# Altium PCB ST-Link-V2.2.PcbDoc
Units mm, origin at the board's own origin, x right, y up, seen from the top; angles counter-clockwise.
Board outline 30.17 x 15.17 mm, 2 copper layers (Top Layer, Bottom Layer); 33 components, 48 nets, 159 pads, 44 vias.
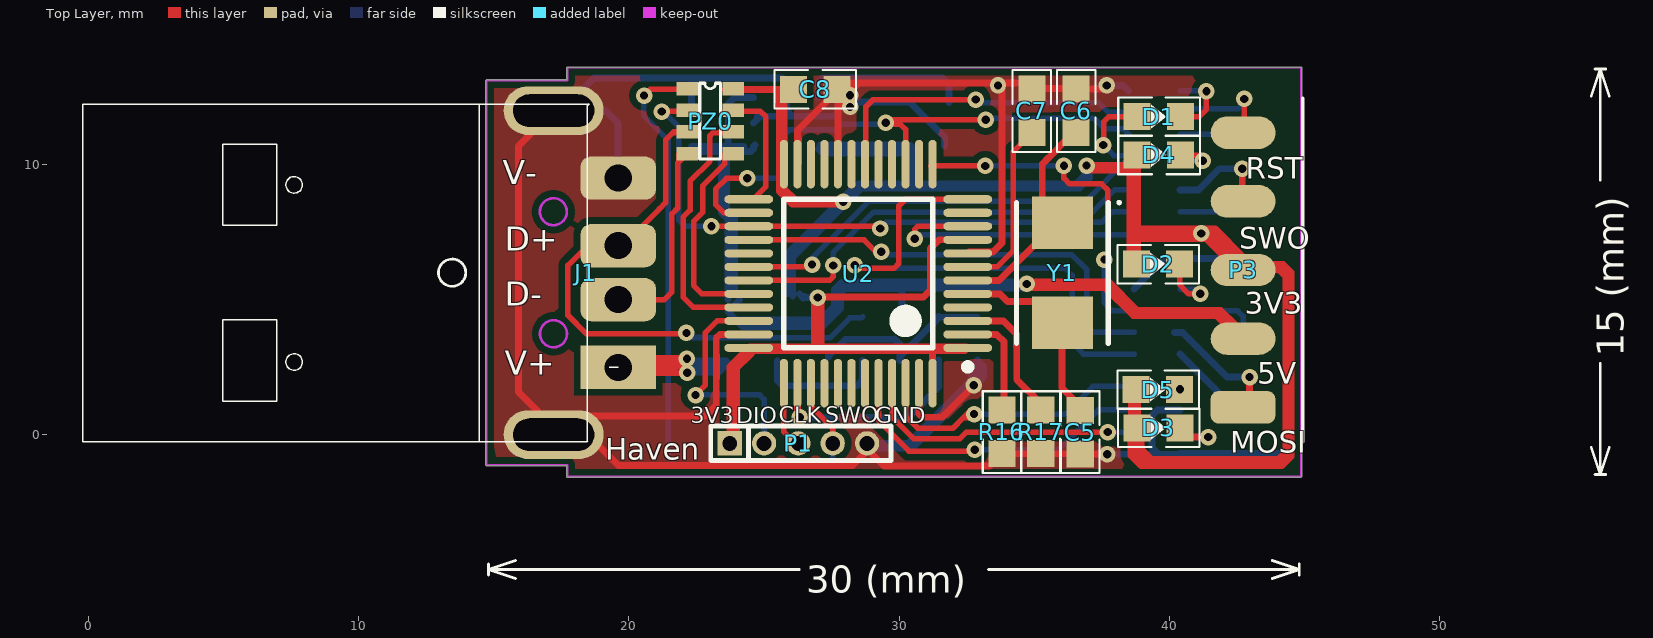
[diagram p0: Top Layer view]
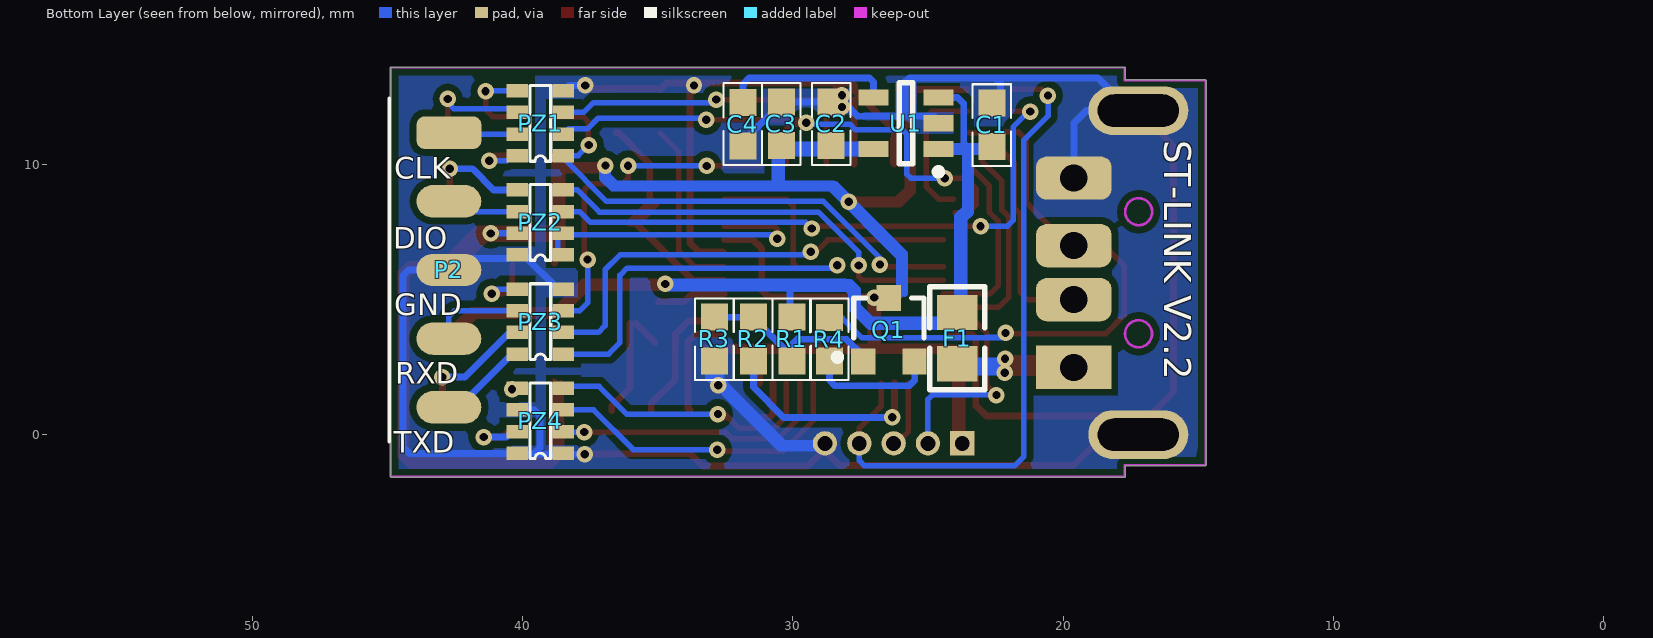
[diagram p1: Bottom Layer view, seen from below]

## Layer stack, top to bottom
Top Layer: signal copper 0.0356
Dielectric: dielectric 0.32, FR-4, Dk 4.8
Bottom Layer: signal copper 0.0356

## Board outline
14.742,-1.143 15.166,-1.143 15.102,-1.143 17.709,-1.143 17.709,-1.544 ccw(c17.735,-1.544) 17.723,-1.566 ccw(c17.735,-1.544) 17.735,-1.569 44.855,-1.569 ccw(c44.855,-1.544) 44.873,-1.562 cw(c44.855,-1.544) 44.873,-1.562 44.885,-1.55 cw(c44.866,-1.532) 44.884,-1.551 44.884,-1.55 ccw(c44.866,-1.532) 44.892,-1.532 44.892,13.574 ccw(c44.866,13.574) 44.866,13.6 17.739,13.6 ccw(c17.739,13.574) 17.713,13.574 17.713,13.127 14.742,13.127 ccw(c14.742,13.102) 14.717,13.102 14.717,-1.117 ccw(c14.742,-1.117)

## Design rules (kind name [scope] priority, off if disabled: settings)
Clearance Clearance_GND [InPolygon] p1: gap=0.254
Clearance [All] p2: gap=0.178
DiffPairsRouting [All] p1: maxlimit=0.254 minlimit=0.254 mostfreqgap=0.254 maxuncoupledlength=12.7
HoleToHoleClearance [All] p1 off: gap=0.254 allowstackedmicrovias=TRUE
MinimumSolderMaskSliver [All] p1 off: minsoldermaskwidth=0.254
PlaneConnect [All] p1: planeconnectstyle=Direct reliefexpansion=0.508 reliefentries=4 reliefconductorwidth=0.254 reliefairgap=0.254
PolygonConnect [All] p1: connectstyle=Direct reliefconductorwidth=0.254 reliefentries=4 polygonreliefangle="90 Angle"
RoutingVias [All] p1: holewidth=0.305 width=0.61 viastyle="Through Hole" minholewidth=0.305 minwidth=0.61 maxholewidth=0.305 maxwidth=0.61
SilkToSilkClearance [All] p1 off: silktosilkclearance=0.254
SilkscreenOverComponentPads [All] p1 off: minsilkscreentomaskgap=0.254
SolderMaskExpansion [All] p1: expansion=0.102
Width [All] p1: maxlimit=0.508 minlimit=0.203 preferedwidth=0.203
22 further rules are at their usual default settings.

## Classes and differential pairs
differential pair USB: +USB_P -USB_N

## Components (designator, comment, footprint, x,y, rotation, side; value= is the part's Value field where it differs from the comment)
C1 "Cap" C-0603 22.644,11.454 r270 bottom
C2 "Cap" C-0603 28.586,11.495 r270 bottom
C3 "Cap" C-0603 30.428,11.495 r270 bottom
C4 "Cap" C-0603 31.85,11.496 r90 bottom
C5 "Cap" C-0603 36.703,0.099 r90 top
C6 "Cap" C-0603 36.549,11.975 r270 top
C7 "Cap" C-0603 34.915,11.975 r270 top
C8 "Cap" C-0603 26.895,12.776 r180 top
D1 "LED" SMT_LED_0603 39.607,11.773 r0 top
D2 "LED2" SMT_LED_0603 39.579,6.309 r0 top
D3 "LED2" SMT_LED_0603 39.595,0.25 r0 top
D4 "LED" SMT_LED_0603 39.608,10.349 r0 top
D5 "LED2" SMT_LED_0603 39.572,1.668 r0 top
F1 "Fuse1" 0805-1 23.927,3.576 r270 bottom
J1 "USB" USB-B 18.417,5.995 r90 top
P1 "Header 5" SIP5-1.27 25.005,-0.319 r180 top
P2 "Header 5" HEADER_5 42.726,11.175 r270 bottom
P3 "Header 5" HEADER_5 42.726,1.015 r90 top
PZ0 "1K" AR0603*4 22.162,12.801 r0 top
PZ1 "1K" AR0603*4 38.494,10.322 r0 bottom
PZ2 "1K" AR0603*4 38.494,6.655 r0 bottom
PZ3 "1K" AR0603*4 38.494,2.986 r0 bottom
PZ4 "1K" AR0603*4 38.494,-0.683 r0 bottom
Q1 "NPN" SOT23-3 26.453,3.884 r180 bottom
R1 "Res1" 0603-1 30.039,3.549 r270 bottom
R2 "Res1" 0603-1 31.464,3.549 r270 bottom
R3 "Res1" 0603-1 32.908,3.549 r270 bottom
R4 "Res1" 0603-1 28.65,3.523 r90 bottom
R16 "Res1" 0603-1 33.807,0.11 r270 top
R17 "Res1" 0603-1 35.242,0.11 r270 top
U1 "SPX3819" SOT23-5 25.819,11.526 r0 bottom
U2 "STM32F103CBT6" LQFP48_N 28.49,5.961 r180 top locked
Y1 "8M" "XAL5032 2-Leads" 36.044,5.989 r270 top

## Footprints (in the part's own frame and the unit in brackets; to place one, negate y for a bottom-side part, rotate by r counter-clockwise, add the part's x,y. Pads: shape width x height; smd on the part's side, far side on the other; paste and mask are expansions set on the pad)
0603-1 [mm]
  rect 1x1 smd: 1(-0.799,0) 2(0.813,0)
  silkscreen extent -1.5,-0.71 1.52,0.71, body extent -0.8,-0.4 0.8,0.4, height 0.3
0805-1 [mm]
  rect 1.3x1.5 smd: 1(-0.95,0) 2(0.95,0)
  silkscreen extent -1.91,-1.02 1.9,1.02, body extent -1,-0.62 1,0.63, height 0.5
AR0603*4 [mm]
  rect 0.8x0.5 smd: 1(0,0) 2(0,-0.8) 3(0,-1.6) 4(0,-2.4) 5(1.7,-2.4) 6(1.7,-1.6) 7(1.7,-0.8) 8(1.7,0)
  silkscreen extent 0.46,-2.6 1.23,0.2, body extent 0.04,-2.81 1.64,0.43, height 0.3
C-0603 [mm] "贴?"
  rect 1x1 smd: 1(-0.813,0) 2(0.799,0)
  silkscreen extent -1.51,-0.71 1.51,0.71, body extent -0.8,-0.4 0.8,0.4, height 0.3
HEADER_5 [mm]
  rrect50% 1.2x2.4 smd: 1(0,0)
  oval 1.2x2.4 smd: 2(2.54,0) 3(5.08,0) 4(7.62,0) 5(10.16,0)
  silkscreen extent -1.27,-2.21 11.43,-2.21, body extent -1.27,-10.75 11.43,0.79, height 1.78
LQFP48_N [mm] "Thin QFP, 48-Leads, Body 7x7mm, Pitch 0.5mm, IPC Medium Density"
  oval 1.8x0.3 smd: 1(-4.05,2.75) 2(-4.05,2.25) 3(-4.05,1.75) 4(-4.05,1.25) 5(-4.05,0.75) 6(-4.05,0.25) 7(-4.05,-0.25) 8(-4.05,-0.75) 9(-4.05,-1.25) 10(-4.05,-1.75) 11(-4.05,-2.25) 12(-4.05,-2.75) 25(4.05,-2.75) 26(4.05,-2.25) 27(4.05,-1.75) 28(4.05,-1.25) 29(4.05,-0.75) 30(4.05,-0.25) 31(4.05,0.25) 32(4.05,0.75) 33(4.05,1.25) 34(4.05,1.75) 35(4.05,2.25) 36(4.05,2.75)
  oval 0.3x1.8 smd: 13(-2.75,-4.05) 14(-2.25,-4.05) 15(-1.75,-4.05) 16(-1.25,-4.05) 17(-0.75,-4.05) 18(-0.25,-4.05) 19(0.25,-4.05) 20(0.75,-4.05) 21(1.25,-4.05) 22(1.75,-4.05) 23(2.25,-4.05) 24(2.75,-4.05) 37(2.75,4.05) 38(2.25,4.05) 39(1.75,4.05) 40(1.25,4.05) 41(0.75,4.05) 42(0.25,4.05) 43(-0.25,4.05) 44(-0.75,4.05) 45(-1.25,4.05) 46(-1.75,4.05) 47(-2.25,4.05) 48(-2.75,4.05)
  silkscreen extent -4.18,-2.75 2.75,3.57, body extent -3.5,-3.5 3.5,3.5, height 1.6
SIP5-1.27 [mm]
  rect 0.9x0.9 hole 0.55: 1(1.27,0)
  round 0.9 hole 0.55: 2(0,0) 3(-1.27,0) 4(-2.54,0) 5(-3.81,0)
  silkscreen extent -4.7,-0.64 1.97,0.64
SMT_LED_0603 [mm]
  rect 1x1 smd: 1(-0.8,0) 2(0.8,0)
  silkscreen extent -1.5,-0.71 1.52,0.71, body extent -0.81,-0.4 0.81,0.4, height 0.6
SOT23-3 [mm]
  rect 0.9x0.95 smd: 1(-0.95,-1.175) 2(0.95,-1.175) 3(0,1.175)
  silkscreen extent -2.03,-1.14 1.3,1.18, body extent -1.45,-1.4 1.45,1.4, height 1.2
SOT23-5 [mm] "Max4173"
  rect 1.1x0.6 smd: 1(-1.2,0.95) 2(-1.2,0) 3(-1.2,-0.95) 4(1.2,-0.95) 5(1.2,0.95)
  silkscreen extent -1.32,-1.5 0.25,1.92, body extent -1.4,-1.45 1.4,1.45, height 1.2
USB-B [mm]
  rect 1.6x2.8 hole 1: 1(-3.5,-1.195)
  rrect50% 1.6x2.8 hole 1: 2(-1,-1.195) 3(1,-1.195) 4(3.5,-1.195)
  oval 1.8x3.7 hole 1.2 slot 3 at 90 deg: 5(5.994,1.195) 6(-5.994,1.195)
  silkscreen extent -6.25,-1.2 6.25,18.62, body extent -6.25,-1.43 6.25,18.6, height 4.52
"XAL5032 2-Leads" [mm] "DFN, 2-Leads, Body 3.20x5.00mm, Pitch 3.70mm, IPC Low Density"
  rect 1.95x2.25 smd: 1(-1.85,0) 2(1.85,0)
  silkscreen extent -2.65,-1.7 2.6,2.15, body extent -2.6,-1.7 2.6,1.7, height 0.45

## Part data
C1 C2 C3 C4 C8: "Capacitor"
D1 D4: "LED ·¢¹"
D2 D3 D5: "Typical RED, GREEN, YELLOW, AMBER GaAs LED"
F1: "保?"
J1: "USB接?"
P1 P2 P3: "Header, 5-Pin"
PZ0 PZ1 PZ2 PZ3 PZ4: library part RES4R
Q1: library part NPN1, "ÌùÆ"
R1 R2 R3 R4 R16 R17: "ÌùÆ"
U2: library part STM32F103C8T6, "STM32 ARM-based 32-bit MCU with 64 Kbytes Flash, 48-pin LQFP, Industrial Temperature"
Y1: library part XTAL

## Via types
v1: diameter 0.61, hole 0.305, Top Layer to Bottom Layer, 44 vias

## Nets (pads, with @x,y where several pads share a name; then routed paths per layer and width w, separated by ;. In a path a pad name is that pad's centre, name@x,y a point inside that pad or via, vN(x,y) a via of type N, cw(c..) or ccw(c..) an arc to the next point about the centre after c; other vN are vias at no path point)
3.3V: C2.2 C3.2 C8.2 D2.1 D3.1 D4.1 D5.1 P1.1 P3.3 PZ0.8 PZ2.7 Q1.3 U1.5 U2.1 U2.9 U2.24 U2.36 U2.48 | length 172.1
  Top Layer w0.254: P1.1@23.512,-0.095 P1.1 ; PZ0.8@23.553,12.773 C8.2@25.681,12.773 ; P1.1@23.763,0.082 23.735,0.054 P1.1 ; P1.1@23.805,-0.319 P1.1 ; C8.2@25.74,12.545 C8.2@25.74,12.536 ; C8.2 C8.2@26.093,12.773 ; U2.48 31.24,3.116 ; 31.24,3.211 31.24,3.116 ; U2.1@32.414,3.211 U2.1 ; U2.9 31.482,7.211 31.153,6.882 31.153,5.339 30.909,5.095 v1@27.124,5.095 ; U2.1@33.262,3.211 U2.1 ; D2.1@38.532,6.556 D2.1@38.532,6.692 ; D5.1@38.592,1.892 38.592,0.93 ; D4.1@38.765,10.112 D4.1@38.733,10.112 ; D5.1@38.818,1.945 D3.1@38.818,0.704 ; D2.1@38.825,6.354 38.825,7.251 ; 38.951,-0.453 38.951,-0.532 ; P3.3@42.29,5.821 P3.3@42.588,6.119 ; P3.3@43.145,6.119 P3.3@42.713,6.119 ; 24.44,2.922 23.991,2.472 23.991,0.047 23.763,-0.18 23.763,0.164 23.746,0.181 23.746,2.517 24.345,3.116 U2.36@24.44,3.116 ; 24.44,2.922 U2.36@24.44,3.116 ; 24.44,2.922 U2.36@24.635,3.116 ; U2.36@24.44,3.116 U2.36 ; U2.36@24.44,3.116 U2.36@24.635,3.116 ; U2.36 23.76,3.211 23.735,3.186 U2.36 ; U2.36 24.486,3.256 U2.36@24.863,3.256 ; U2.36 24.539,3.211 U2.36@24.635,3.116 ; U2.36@24.635,3.116 U2.36@24.813,3.116 ; U2.36@24.813,3.116 U2.36@24.909,3.211 ; U2.36@24.813,3.116 31.24,3.116 ; U2.36@24.863,3.256 U2.36@24.909,3.211 ; U2.36@24.863,3.256 26.433,3.256 26.433,3.25 ; U2.36@24.909,3.211 26.433,3.211 ; C8.2@25.681,12.773 25.803,12.896 26.101,12.896 C8.2@25.978,12.773 ; C8.2@25.681,12.773 25.537,12.629 25.537,12.332 C8.2@25.74,12.536 ; C8.2@25.681,12.773 C8.2@25.978,12.773 ; C8.2@25.74,12.421 C8.2@25.74,12.536 ; C8.2@25.74,12.421 U2.24 25.74,9.098 26.16,8.678 27.874,8.678 v1(27.933,8.619) 27.849,8.535 26.034,8.535 25.574,8.995 25.574,12.254 C8.2@25.74,12.421 ; C8.2@25.74,12.421 C8.2@26.093,12.773 ; C8.2@25.74,12.536 C8.2@25.978,12.773 ; C8.2@25.978,12.773 C8.2@26.093,12.773 ; 26.433,3.211 26.394,3.25 26.433,3.25 ; 26.433,3.211 26.433,3.25 ; 26.433,3.25 26.878,3.25 ; 26.878,3.25 26.878,5.073 26.9,5.095 v1@27.124,5.095 ; 26.878,3.25 27.12,3.25 ; 27.12,3.25 27.12,5.09 v1@27.124,5.095 ; 27.12,3.25 32.501,3.25 U2.1 ; 31.24,3.116 32.445,3.116 U2.1 ; D2.1@38.532,6.692 38.733,6.893 38.733,7.251 ; D2.1@38.532,6.692 38.532,7.404 ; 38.532,7.404 38.733,7.404 ; 38.532,7.404 38.532,7.612 ; 38.532,7.612 38.733,7.612 ; 38.532,7.612 D4.1@38.532,9.916 ; D4.1@38.532,9.916 38.651,9.916 D4.1@38.825,10.341 ; D4.1@38.532,9.916 38.532,10.049 38.617,9.964 36.944,9.964 v1(36.937,9.957) 37.109,9.784 38.4,9.784 D4.1@38.532,9.916 ; D3.1@38.592,0.478 38.592,0.93 ; D3.1@38.592,0.478 D3.1@38.798,0.684 ; D3.1@38.592,0.478 38.575,0.46 38.575,-0.767 38.946,-1.138 44.172,-1.138 44.505,-0.804 44.505,6.011 44.209,6.307 42.901,6.307 P3.3@42.713,6.119 ; 38.592,0.93 D3.1@38.818,0.704 ; 38.733,7.251 38.825,7.251 ; 38.733,7.251 38.733,7.404 ; 38.733,7.404 38.733,7.612 ; 38.733,7.404 38.825,7.404 ; 38.733,7.612 D4.1@38.733,10.112 ; 38.733,7.612 38.825,7.612 ; D4.1@38.733,10.112 38.596,10.112 D4.1@38.733,10.249 ; D4.1@38.733,10.112 D4.1@38.733,10.249 ; D4.1@38.733,10.249 D4.1@38.825,10.341 ; D3.1@38.798,0.684 D3.1@38.818,0.704 ; D3.1@38.798,0.684 38.798,-0.833 38.951,-0.833 ; D3.1@38.818,0.704 38.951,0.571 38.951,-0.532 ; 38.825,7.251 38.825,7.404 ; 38.825,7.251 41.346,7.251 42.478,6.119 P3.3@42.588,6.119 ; 38.825,7.404 38.825,7.612 ; 38.825,7.404 41.511,7.404 ; 38.825,7.612 D4.1@38.825,10.341 ; 38.825,7.612 v1@41.013,7.612 ; 38.951,-0.833 38.951,-0.532 ; 38.951,-0.833 38.956,-0.833 39.029,-0.906 39.325,-0.906 ; 38.951,-0.532 39.325,-0.906 ; 39.325,-0.906 44.056,-0.906 44.317,-0.645 44.317,5.854 44.121,6.049 44.19,6.119 P3.3@42.713,6.119 ; v1@41.013,7.612 v1(41.176,7.449) 41.511,7.449 ; v1@41.013,7.612 41.701,7.612 42.713,6.6 P3.3@42.713,6.247 ; 41.511,7.404 41.511,7.321 41.573,7.259 ; 41.511,7.404 41.555,7.404 ; 41.511,7.404 41.511,7.449 ; 41.511,7.449 41.555,7.404 ; 41.555,7.404 41.7,7.259 ; 41.573,7.259 P3.3@42.713,6.119 ; 41.573,7.259 41.7,7.259 ; 41.7,7.259 P3.3@42.713,6.247 ; P3.3@42.588,6.119 P3.3@42.713,6.119 ; P3.3@42.588,6.119 P3.3@42.713,6.119 ; P3.3@42.713,6.119 P3.3@42.713,6.247
  Bottom Layer w0.254: 25.875,5.22 25.875,6.706 26.068,6.9 ; Q1.3@26.068,5.128 26.068,6.584 ; Q1.3@26.31,5.201 Q1.3 ; Q1.3@26.337,5.182 26.443,5.077 Q1.3@26.471,5.077 ; Q1.3@26.504,5.11 Q1.3@26.471,5.077 ; v1(26.994,5.077) Q1.3@26.471,5.077 ; U1.5@27.07,10.721 30.147,10.721 30.169,10.699 C3.2@30.169,10.67 ; 30.428,9.246 30.428,9.273 ; v1(36.937,9.957) 36.851,9.87 36.851,9.579 36.555,9.283 30.643,9.283 ; v1@36.977,9.916 37.05,9.844 37.05,9.489 36.684,9.123 28.607,9.123 26.068,6.584 ; PZ2.7@40.394,7.455 41.171,7.455 v1(41.176,7.449) ; 26.068,6.584 26.068,6.9 ; 26.068,6.9 28.428,9.26 28.486,9.26 28.499,9.273 30.428,9.273 ; C3.2@30.308,10.576 U1.5 27.175,10.419 30.152,10.419 C3.2@30.308,10.576 ; C3.2@30.308,10.576 C3.2 ; 30.428,9.273 C3.2 ; 30.428,9.273 30.454,9.273 30.464,9.283 30.643,9.283 ; C3.2 30.666,10.457 30.666,9.306 30.643,9.283
5V: C1.2 F1.1 P3.2 R1.1 U1.1 U1.3 | length 64.5
  Top Layer w0.254: P3.2@43.145,3.579 42.875,3.579 42.619,3.835 P3.2@42.447,3.835 ; P3.2@42.447,3.835 42.447,4.051 41.895,4.604 38.807,4.604 37.75,5.66 34.807,5.66 v1(34.725,5.578) 34.852,5.451 37.624,5.451 38.671,4.404 41.751,4.404 42.319,3.835 P3.2@42.447,3.835
  Bottom Layer w0.254: 23.595,10.711 23.617,10.689 23.617,10.662 ; F1.1@23.667,5.006 23.667,7.98 23.435,8.212 23.435,10.477 ; 23.906,5.245 23.906,8.088 23.617,8.377 23.617,10.477 ; F1.1@24.102,4.988 23.665,4.551 F1.1@23.975,4.241 ; U1.1@24.256,10.662 23.684,10.662 ; U1.1@24.612,10.662 U1.1@24.67,10.721 ; U1.1 24.52,10.477 23.747,10.477 ; U1.3 23.91,12.476 23.684,12.25 23.684,10.662 ; 27.754,5.077 27.754,5.167 27.845,5.259 ; 28.056,5.649 34.654,5.649 v1(34.725,5.578) 34.579,5.432 29.668,5.432 ; R1.1@30.039,4.405 R1.1 30.103,4.413 30.103,5.414 28.275,5.414 ; 23.314,10.477 23.435,10.477 ; 23.314,10.477 23.435,10.598 ; 23.314,10.477 22.505,10.477 22.32,10.662 23.386,10.662 23.435,10.662 ; 23.435,10.477 23.617,10.477 ; 23.435,10.477 23.435,10.598 ; 23.435,10.598 23.435,10.662 ; 23.435,10.662 23.617,10.662 ; 23.617,10.477 23.617,10.662 ; 23.617,10.477 23.747,10.477 ; 23.617,10.662 23.684,10.662 ; 23.684,10.662 23.684,10.54 23.747,10.477 ; F1.1@23.975,4.241 25.351,4.241 ; F1.1@23.975,4.241 24.213,4.003 25.589,4.003 ; 25.351,4.241 27.102,4.241 27.615,4.754 ; 25.351,4.241 25.589,4.003 ; 25.589,4.003 27.16,4.003 27.845,4.689 27.845,4.985 ; 27.615,4.754 27.615,5.37 27.876,5.631 28.491,5.631 28.275,5.414 ; 27.615,4.754 27.845,4.985 ; 27.845,4.985 27.845,5.259 ; 27.845,5.259 28,5.414 28.275,5.414
BOOT0: PZ4.3 U2.44 | length 11.9
  Top Layer w0.203: U2.44 29.24,0.522 30.365,-0.602 32.749,-0.602 v1(32.8,-0.551)
  Bottom Layer w0.203: v1(32.8,-0.551) 35.908,-0.551 37.376,0.917 PZ4.3@38.694,0.917
GND: C1.1 C2.1 C3.1 C4.1 C5.1 C6.1 C7.1 C8.1 J1.4 J1.5 J1.6 P1.5 P2.3 PZ1.4 PZ2.8 PZ3.4 PZ4.1 PZ4.6 PZ4.8 R3.2 R16.2 R17.2 U1.2 U2.8 U2.20 U2.23 U2.35 U2.47 | length 137
  Top Layer w0.254: J1.6 J1.6@17.405,0.001 ; J1.5 15.917,10.685 15.917,1.577 17.405,0.088 J1.6@17.405,0.001 ; J1.6@18.202,0.693 22.843,0.693 23.236,1.085 23.236,2.952 ; 23.238,2.065 23.246,2.074 23.246,2.942 23.236,2.952 ; U2.35@24.184,3.711 23.375,3.711 23.236,3.572 23.236,2.952 ; 26.286,10.949 26.286,10.056 U2.23 26.24,11.25 27.713,12.723 27.713,12.896 27.825,13.008 28.497,13.008 ; C8.1@27.713,12.388 27.874,12.163 27.74,12.163 ; U2.20 27.74,12.163 ; C8.1@27.74,12.341 27.74,12.252 ; P1.5 P1.5@28.815,-0.53 ; U2.47 30.74,0.775 30.869,0.647 31.594,0.647 32.76,1.812 v1(32.76,1.828) ; U2.8 32.586,6.756 33.479,6.756 33.814,7.091 33.814,12.822 v1@33.628,13.008 ; C7.1@34.918,12.771 34.68,13.008 v1@33.628,13.008 ; C7.1@35.1,12.808 36.947,12.808 36.967,12.828 C6.1@36.568,12.785 ; C5.1@36.213,-0.721 C5.1@36.233,-0.701 ; C6.1 37.549,12.787 v1(37.684,12.922) ; C5.1 37.694,-0.714 v1(37.702,-0.722) ; C5.1@37.059,-0.701 C5.1@36.233,-0.701 ; J1.6@17.405,0.001 18.481,0.001 19.618,-1.135 27.998,-1.135 28.275,-1.135 28.815,-0.596 P1.5@28.815,-0.53 ; 27.74,12.163 27.74,12.252 ; 27.74,12.252 28.497,13.008 ; 28.497,13.008 v1@33.628,13.008 ; P1.5@28.815,-0.53 29.446,-1.161 33.348,-1.161 R16.2 C5.1@36.233,-0.701
  Bottom Layer w0.254: J1.5@17.642,11.849 J1.5@17.5,11.991 ; J1.4@19.6,9.491 19.6,11.535 19.144,11.991 J1.5@17.5,11.991 ; C1.1@22.32,12.274 22.32,12.991 22.532,13.203 ; U1.2 U1.2@24.877,11.784 ; U1.2@24.764,11.784 U1.2@24.877,11.784 ; 26.027,11.809 25.847,11.99 25.847,13.042 25.686,13.203 22.532,13.203 ; v1(28.186,12.127) 27.951,12.127 27.608,11.784 U1.2@24.877,11.784 ; C2.1@28.233,12.311 30.38,12.311 31.68,11.011 C4.1@31.68,10.687 ; v1(32.76,1.828) v1@32.76,1.855 ; R3.2@32.76,2.382 v1@32.76,2.129 ; R3.2@32.908,2.741 32.908,2.762 R3.2@33.107,2.563 ; v1(37.684,12.922) 38.294,12.922 PZ1.4 ; v1(37.702,-0.722) 39.596,-0.722 ; PZ3.4@38.694,5.386 39.963,6.655 40.394,6.655 40.522,6.526 42.306,6.526 42.732,6.1 44.214,6.1 44.428,5.885 44.428,-0.454 44.185,-0.697 40.408,-0.697 PZ4.8@40.394,-0.683 ; PZ4.8@40.355,-0.722 39.596,-0.722 ; PZ4.6@40.394,0.917 39.552,0.917 39.355,0.719 39.355,-0.481 39.596,-0.722 ; J1.5@17.5,11.991 18.712,13.203 22.532,13.203 ; v1@32.511,1.855 30.337,-0.319 P1.5 28.992,-0.495 30.503,-0.495 v1@32.853,1.855 ; v1@32.511,1.855 32.486,1.855 v1@32.657,2.026 ; v1@32.511,1.855 v1@32.76,1.855 ; v1@32.511,1.855 v1@32.76,2.104 ; v1@32.657,2.026 32.657,2.485 R3.2 ; v1@32.657,2.026 v1@32.76,2.129 ; v1@32.76,1.855 v1@32.76,2.104 ; v1@32.76,1.855 v1@32.853,1.855 ; v1@32.76,2.104 32.908,2.252 R3.2@32.908,2.277 ; v1@32.76,2.104 v1@32.76,2.129 ; v1@32.76,2.129 R3.2@32.908,2.277 ; v1@32.853,1.855 33.125,2.126 33.125,2.519 R3.2 ; R3.2@32.908,2.277 R3.2
  other v1: 28.188,12.561 33.661,12.922
LED1: D1.2 PZ1.5 | length 2.7
  Top Layer w0.203: D1.2 41.111,11.773 41.371,12.033 v1(41.371,12.711)
  Bottom Layer w0.203: PZ1.5@40.394,12.724 41.359,12.724 v1(41.371,12.711)
LED2: D4.2 PZ1.8 | length 1.8
  Top Layer w0.203: D4.2@40.425,10.341 41.025,10.341 v1(41.233,10.133)
  Bottom Layer w0.203: PZ1.8@40.394,10.324 40.585,10.133 v1(41.233,10.133)
LED_PWR: D2.2 PZ3.5 | length 2.5
  Top Layer w0.203: D2.2 40.379,5.549 40.715,5.213 v1(41.142,5.213)
  Bottom Layer w0.203: PZ3.5@40.394,5.386 40.969,5.386 v1(41.142,5.213)
NetC4_2: C4.2 U1.4 | length 6.2
  Bottom Layer w0.254: U1.4 27.019,13.051 27.164,13.196 31.619,13.196 31.85,12.964 C4.2
NetC7_2: C7.2 U2.7 | length 6.6
  Top Layer w0.203: U2.7 33.628,6.211 34.222,6.804 34.222,10.462 C7.2@34.918,11.159
NetQ1_1: Q1.1 R1.2 R2.1 R3.1 | length 7.2
  Bottom Layer w0.254: Q1.1@27.393,2.874 27.393,2.912 28.012,3.531 29.829,3.531 29.841,3.543 30.039,3.345 R1.2@30.039,2.893 ; R1.2 R1.2@30.039,2.893 ; R2.1@31.433,4.361 31.458,4.336 31.458,4.348 R2.1 ; R2.1@31.464,4.374 R2.1 ; R3.1@32.878,4.348 R2.1 ; R1.2@30.039,2.893 31.464,4.319 R2.1
NetQ1_2: Q1.2 R4.1 | length 4.8
  Bottom Layer w0.254: Q1.2@25.493,2.727 25.493,2.016 25.699,1.81 28.438,1.81 28.65,2.023 R4.1@28.65,2.75
NetR16_1: R16.1 U2.2 | length 4
  Top Layer w0.254: U2.2 33.611,3.711 33.877,3.445 33.877,0.979 R16.1
NetR17_1: R17.1 U2.3 | length 5.2
  Top Layer w0.254: U2.3 33.865,4.211 34.35,3.726 34.35,3.271 34.352,3.269 34.352,2.051 35.242,1.16 R17.1
OS_IN: C5.2 U2.5 Y1.2 | length 7.1
  Top Layer w0.254: U2.5 33.729,5.211 34.008,4.932 Y1.2@34.984,4.932 ; Y1.2@35.099,3.407 Y1.2@35.804,4.112 ; Y1.2@36.027,4.123 36.027,1.735 36.703,1.059 C5.2
OS_OUT: C6.2 U2.6 Y1.1 | length 14.5
  Top Layer w0.254: U2.6 33.703,5.711 35.804,7.812 Y1.1@35.298,8.318 ; 35.514,10.232 35.298,10.016 ; C6.2 36.458,11.175 35.298,10.016 ; Y1.1@35.298,8.318 35.056,8.561 Y1.1 ; Y1.1@35.298,8.318 35.298,8.255 35.733,7.82 36.027,7.823 Y1.1@35.298,8.553 ; Y1.1@35.298,8.318 Y1.1@35.298,8.553 ; Y1.1@35.298,8.553 35.195,8.656 Y1.1 ; Y1.1@35.298,8.553 Y1.1@35.298,8.584 ; Y1.1@35.298,8.584 Y1.1 ; Y1.1@35.298,8.584 35.298,10.016
P_MOSI: P3.1 PZ3.7 | length 4.6
  Top Layer w0.254: v1(42.965,2.131) 42.965,1.218 P3.1@43.145,1.039
  Bottom Layer w0.254: PZ3.7 40.48,3.786 42.135,2.131 v1(42.965,2.131)
P_NRST: P3.5 PZ1.6 | length 4
  Top Layer w0.203: v1(42.767,12.424) 42.767,11.576 P3.5@43.145,11.199
  Bottom Layer w0.203: PZ1.6@40.394,11.924 40.529,12.059 42.54,12.059 42.767,12.286 v1(42.767,12.424)
P_RXD: P2.4 PZ3.6 | length 3.8
  Bottom Layer w0.203: PZ3.6@40.394,4.586 42.526,4.586 42.732,4.38 P2.4@42.732,3.56 ; P2.4@42.804,3.92 P2.4@43.164,3.56
P_SWCLK: P2.1 PZ1.7 | length 2.5
  Bottom Layer w0.203: PZ1.7@40.394,11.124 P2.1@42.676,11.124 ; P2.1@42.607,11.054 P2.1@42.676,11.124 ; P2.1@42.732,11.18 P2.1@42.676,11.124
P_SWDIO: P2.2 PZ2.6 | length 2.5
  Bottom Layer w0.203: PZ2.6@40.394,8.255 42.347,8.255 P2.2@42.732,8.64
P_SWO: P3.4 PZ2.5 | length 3.8
  Top Layer w0.254: v1(42.698,9.84) 42.698,8.674 P3.4@42.713,8.659
  Bottom Layer w0.254: PZ2.5@40.394,9.055 41.078,9.055 41.863,9.84 v1(42.698,9.84)
P_TXD: P2.5 PZ3.8 | length 3.9
  Bottom Layer w0.254: PZ3.8@40.394,2.986 42.36,1.02 P2.5@42.732,1.02 ; P2.5@42.563,1.189 P2.5@42.732,1.02 ; P2.5@43.27,1.02 P2.5@42.732,1.02
RX_LED_N: D5.2 PZ4.5 | length 0.5
  Top Layer w0.203: v1(40.391,1.686) v1(40.391,1.686)
  Bottom Layer w0.203: v1(40.391,1.686) 40.523,1.554 40.557,1.554 PZ4.5@40.394,1.717
RX_LED_P: PZ4.4 U2.46 | length 11.1
  Top Layer w0.203: U2.46 30.24,0.701 30.701,0.24 31.987,0.24 32.37,0.623 ; v1@32.7,0.865 32.612,0.865 32.37,0.623 ; v1@32.77,0.682 32.712,0.623 32.37,0.623
  Bottom Layer w0.203: v1@32.829,0.682 32.77,0.682 32.77,0.756 36.143,0.756 37.173,1.785 38.626,1.785 PZ4.4@38.694,1.717
  other v1: 32.776,0.767
STA_LED: D1.1 PZ1.1 U2.30 | length 19.3
  Top Layer w0.203: U2.30 v1@26.697,6.211 ; v1@26.741,6.211 v1@26.697,6.211 ; v1(26.781,6.295) v1@26.697,6.211 ; v1(37.551,10.717) 37.577,10.742 37.577,11.586 37.763,11.773 D1.1
  Bottom Layer w0.203: v1(26.781,6.295) 26.781,6.546 28.872,8.636 36.889,8.636 38.494,10.241 PZ1.1 37.946,10.322 v1(37.551,10.717)
SWCLK0: P1.3 U2.37 | length 2.7
  Top Layer w0.203: U2.37 25.74,0.106 26.08,-0.234 P1.3@26.491,-0.234
SWDIO0: P1.2 U2.34 | length 8.2
  Top Layer w0.203: v1(22.473,1.467) 22.829,1.823 22.829,3.768 23.272,4.211 U2.34@24.17,4.211
  Bottom Layer w0.203: v1(22.473,1.467) 22.479,1.473 24.839,1.473 25.005,1.307 P1.2
SWO0: P1.4 PZ0.1 U2.39 | length 24.6
  Top Layer w0.203: v1(20.565,12.549) 20.789,12.773 PZ0.1@21.853,12.773 ; U2.39 26.74,1.054 27.063,0.732 27.065,0.732 27.545,0.252 P1.4
  Bottom Layer w0.203: v1(20.565,12.549) 20.558,12.542 20.558,11.795 20.983,11.37 21.453,10.9 21.453,-0.804 21.801,-1.152 27.35,-1.152 27.545,-0.957 P1.4
T_JTCK: PZ1.2 U2.15 U2.26 | length 21.4
  Top Layer w0.203: U2.26@23.994,8.211 23.517,8.211 23.213,8.515 23.213,9.086 23.613,9.487 v1(24.384,9.487) ; v1(29.507,11.546) 29.507,11.657 v1@29.566,11.599 ; U2.15 30.24,11.295 30.041,11.494 29.463,11.494 29.624,11.656 v1(33.204,11.656)
  Bottom Layer w0.203: v1(24.384,9.487) 24.387,9.49 25.635,9.49 25.791,9.645 25.791,11.127 25.945,11.281 27.679,11.281 27.893,11.494 29.463,11.494 29.463,11.501 v1(29.507,11.546) ; v1(33.204,11.656) 33.261,11.713 37.203,11.713 37.601,11.315 38.301,11.315 PZ1.2
T_JTDI: U2.17
T_JTDO: U2.16
T_JTMS: PZ0.2 PZ2.3 U2.27 | length 22.8
  Top Layer w0.203: v1(21.225,11.954) 21.083,11.954 21.103,11.973 PZ0.2@21.853,11.973 ; v1(23.057,7.711) U2.27 29.226,7.711 v1(29.307,7.63)
  Bottom Layer w0.203: v1(21.225,11.954) 21.083,11.954 21.071,11.942 21.296,11.942 21.858,11.38 21.858,7.926 22.073,7.711 v1(23.057,7.711) ; v1(29.307,7.63) 29.531,7.854 37.493,7.854 37.894,8.255 PZ2.3@38.694,8.255
T_MOSI: PZ3.2 U2.28 | length 16.9
  Top Layer w0.203: U2.28 28.709,7.211 29.153,6.766 v1(29.343,6.766)
  Bottom Layer w0.203: v1(29.343,6.766) 29.457,6.653 36.395,6.653 36.945,6.103 36.945,4.037 37.196,3.786 PZ3.2@38.694,3.786
T_NRST: PZ1.3 U2.18 | length 12.4
  Top Layer w0.203: U2.18 28.77,10.041 28.77,12.134 29.027,12.391 32.825,12.391 v1(32.833,12.399)
  Bottom Layer w0.203: v1(32.833,12.399) 32.833,12.426 32.97,12.289 37.376,12.289 37.742,11.924 PZ1.3@38.493,11.924 ; PZ1.3 PZ1.3@38.493,11.924 ; PZ1.3@38.694,11.924 PZ1.3@38.493,11.924
T_RXD: PZ3.3 U2.13 | length 12.4
  Top Layer w0.203: U2.13@31.174,9.944 v1(33.191,9.944) ; v1(36.098,9.953) 36.098,9.497 36.314,9.281 37.49,9.281 37.727,9.045 37.727,6.607 v1(37.599,6.479)
  Bottom Layer w0.203: v1(33.191,9.944) 33.2,9.953 v1(36.098,9.953) ; v1(37.599,6.479) 37.599,4.88 37.893,4.586 PZ3.3
T_SWDIO_IN: PZ0.7 U2.25 | length 5.4
  Top Layer w0.203: PZ0.7@23.553,11.973 24.863,11.973 25.07,11.766 25.07,9.178 24.603,8.711 U2.25 U2.25@24.062,8.711
T_SWO: PZ2.4 U2.31 | length 16.2
  Top Layer w0.203: U2.31 27.428,5.711 27.569,5.851 v1(27.569,6.265)
  Bottom Layer w0.203: v1(27.569,6.265) 27.569,6.753 29.056,8.24 37.161,8.24 37.976,9.055 PZ2.4@38.694,9.055
T_TXD: PZ3.1 U2.12 | length 19.9
  Top Layer w0.203: v1(28.365,6.268) 28.48,6.152 29.809,6.152 29.989,6.332 29.989,8.47 30.23,8.711 U2.12
  Bottom Layer w0.203: v1@28.21,6.422 28.356,6.422 v1@28.378,6.4 ; v1(28.365,6.268) 28.47,6.162 36.134,6.162 36.399,5.896 36.399,3.406 36.82,2.986 PZ3.1@38.694,2.986
TX_LED_N: D3.2 PZ4.7 | length 2.3
  Top Layer w0.254: D3.2 40.733,-0.087 41.209,-0.087 v1(41.439,-0.087)
  Bottom Layer w0.254: PZ4.7@40.394,0.117 40.598,-0.087 v1(41.439,-0.087)
TX_LED_P: PZ4.2 U2.45 | length 10.9
  Top Layer w0.203: U2.45 29.74,0.658 30.539,-0.141 32.252,-0.141 32.49,0.098 v1(37.722,0.098) v1@37.94,0.098
  Bottom Layer w0.203: v1(37.722,0.098) 38.675,0.098 PZ4.2@38.694,0.117
TXD0: U2.21
USB_N: J1.2 PZ0.4 | length 7.8
  Top Layer w0.203: J1.2@19.6,4.991 21.308,4.991 21.594,5.277 21.594,8.17 21.822,8.398 21.822,10.06 21.853,10.092 ; PZ0.4@21.853,10.373 21.853,10.092 ; PZ0.4 21.853,10.092
USB_N_MCU: PZ0.5 U2.32 | length 7.5
  Top Layer w0.203: PZ0.5@23.553,10.373 23.553,10.033 22.74,9.22 22.74,8.237 22.396,7.892 22.396,5.525 22.709,5.211 U2.32
USB_P: J1.3 PZ0.3 R4.2 | length 23.6
  Top Layer w0.203: J1.3@19.6,6.991 J1.3@20.895,6.991 ; PZ0.3@21.853,11.173 21.635,11.173 ; v1@22.136,3.623 v1(22.136,3.766) ; v1@22.157,3.602 22.025,3.734 18.436,3.734 17.75,4.42 17.75,6.261 18.484,6.995 J1.3 19.777,6.995 21.137,8.356 21.137,8.36 21.364,8.587 21.364,10.903 21.635,11.173 ; PZ0.3 21.662,11.201 21.635,11.173
  Bottom Layer w0.203: v1(22.136,3.766) 22.136,3.623 22.157,3.602 22.825,3.602 22.844,3.583 ; v1@22.285,3.583 22.844,3.583 ; R4.2@28.65,4.362 28.611,4.322 28.179,4.322 27.44,3.583 22.844,3.583
USB_P_MCU: PZ0.6 U2.33 | length 9.6
  Top Layer w0.203: PZ0.6@23.553,11.173 23.113,11.173 23.001,11.06 23.001,10.11 22.274,9.383 22.274,8.309 22.015,8.05 22.015,5.088 22.391,4.711 U2.33
USB_RENM: R2.2 U2.38 | length 8.5
  Top Layer w0.254: U2.38 26.24,0.728 v1(26.325,0.643)
  Bottom Layer w0.254: v1(26.325,0.643) 30.345,0.643 31.464,1.763 R2.2 ; 31.434,2.148 31.434,2.731 R2.2@31.464,2.762
VBUS: F1.2 J1.1 | length 13.5
  Top Layer w0.254: J1.1@19.676,2.567 21.65,2.567 ; J1.1@19.764,2.327 J1.1@20.732,2.327 ; J1.1@19.928,2.819 21.261,2.819 ; v1(22.168,2.295) 21.77,2.295 ; J1.1@20.732,2.327 20.763,2.295 21.77,2.295 ; J1.1@20.732,2.327 21.738,2.327 21.77,2.295 ; 21.261,2.819 21.272,2.808 21.824,2.808 ; 21.261,2.819 21.824,2.819 21.824,2.808 ; 21.65,2.567 21.824,2.741 21.824,2.808 ; 21.65,2.567 21.91,2.567 v1(22.151,2.808) 21.824,2.808
  Bottom Layer w0.254: v1(22.151,2.808) 22.168,2.791 v1(22.168,2.295) ; v1@22.26,2.723 23.593,2.723 23.665,2.651 23.528,2.514 22.469,2.514 ; v1@22.379,2.327 23.341,2.327 F1.2@23.463,2.449
WKUP: PZ2.1 PZ2.2 U2.10 | length 11.3
  Top Layer w0.203: v1(30.581,7.254) 30.581,7.601 30.691,7.711 U2.10
  Bottom Layer w0.203: v1(30.581,7.254) 30.731,7.404 38.643,7.404 38.694,7.455 PZ2.1@38.694,6.655
pads on no net: U2.4 U2.11 U2.14 U2.19 U2.22 U2.29 U2.40 U2.41 U2.42 U2.43

## Polygon pours and split planes (outlines as drawn)
GND on Bottom Layer "Top Layer-No Net" (solid, remove dead copper, pour order 4): 44.866,13.574 17.739,13.574 17.739,13.098 14.742,13.098 14.742,-1.106 14.743,-1.105 17.735,-1.105 17.735,-1.544 44.855,-1.544
GND on Top Layer "Top Layer-No Net" (solid, remove dead copper, pour order 8): 44.866,13.574 17.739,13.574 17.739,13.098 14.742,13.098 14.742,-1.106 14.743,-1.105 17.735,-1.105 17.735,-1.544 44.855,-1.544

## Keep-outs
Keep-Out Layer:
  circle w0.1: c17.216,3.735 r0.5
  lines w0.05: 15.102,-1.105 17.735,-1.105 17.735,-1.544 17.735,-1.544 44.855,-1.544 44.866,-1.532 44.866,13.574 17.739,13.574 17.739,13.098 14.742,13.098 14.742,11.873 14.742,-1.106 15.329,-1.106
  lines w0.1: 17.711,8.27 ccw(c17.211,8.252) 17.711,8.252

## Silkscreen, mask and mechanical layers (free items; w line width, h text height)
Top Overlay:
  lines w0.1: 14.808,-5.186 14.808,-4.786 ; 15.808,-5.319 14.808,-4.986 ; 15.808,-4.652 14.808,-4.986 ; 26.31,-4.986 14.808,-4.986 ; 33.307,-4.986 44.808,-4.986 ; 43.808,-5.319 44.808,-4.986 ; 43.808,-4.652 44.808,-4.986 ; 44.808,-5.186 44.808,-4.786 ; 55.611,-0.473 55.945,-1.473 ; 55.611,12.527 55.945,13.527 ; 55.745,-1.473 56.145,-1.473 ; 55.745,13.527 56.145,13.527 ; 55.945,2.635 55.945,-1.473 ; 55.945,9.418 55.945,13.527 ; 56.278,-0.473 55.945,-1.473 ; 56.278,12.527 55.945,13.527
  text "RST" at 42.821,9.468 h0.8
  text "SWO" at 42.585,6.889 h0.8
  text "3V3" at 42.793,4.469 h0.8
  text "15 (mm)" at 56.806,2.889 h1 r90
  text "5V" at 43.25,1.895 h0.8
  text "CLK" at 25.544,0.436 h0.6
  text "SWO" at 27.273,0.446 h0.6
  text "3V3" at 22.287,0.423 h0.6
  text "DIO" at 23.97,0.426 h0.6
  text "GND" at 29.124,0.426 h0.6
  text "MOSI" at 42.246,-0.662 h0.8
  text "Haven" at 19.125,-0.923 h0.8
  text "30 (mm)" at 26.564,-5.848 h1
Bottom Overlay:
  text "ST-LINK V2.2" at 16.267,10.893 h1 r90
  text "CLK" at 44.749,9.472 h0.8
  text "DIO" at 44.795,6.873 h0.8
  text "GND" at 44.753,4.421 h0.8
  text "RXD" at 44.708,1.886 h0.8
  text "TXD" at 44.767,-0.668 h0.8

## Text inside footprints (layer, text, board x,y; h text height)
J1: Top Overlay "D-" at 15.418,4.471 h1.52; Top Overlay "V-" at 15.342,8.971 h1.52; Top Overlay "V+" at 15.418,1.931 h1.52; Top Overlay "D+" at 15.418,6.503 h1.52